# Altium PCB PCB1.PcbDoc
Units mm, origin at the board's own origin, x right, y up, seen from the top; angles counter-clockwise.
Board outline 40.13 x 44.7 mm, 2 copper layers (Top Layer, Bottom Layer); 14 components, 13 nets, 37 pads, 0 vias.
Unrouted connection lines stored in the file: 2.
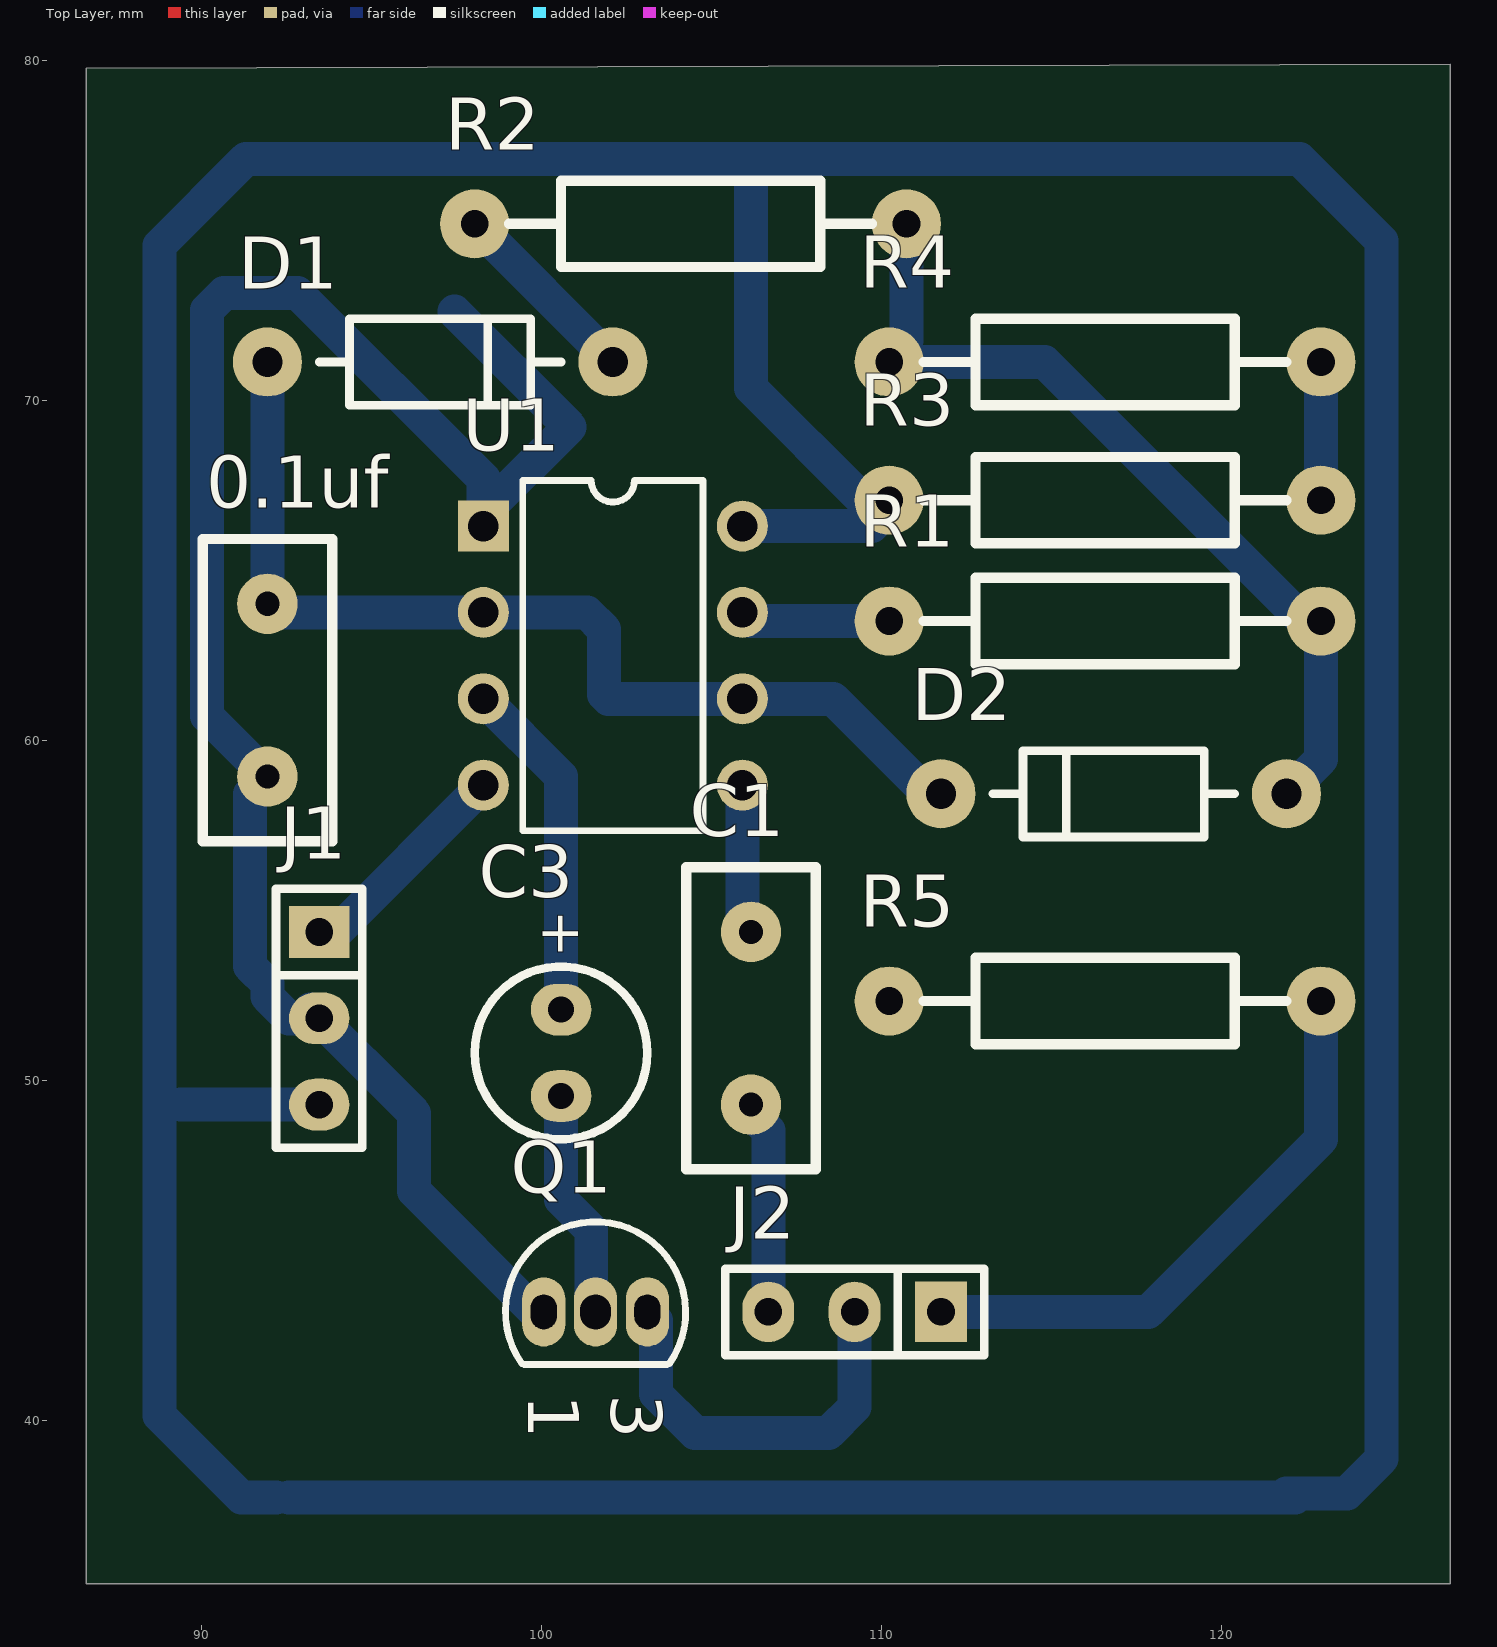
[diagram p0: Top Layer view]
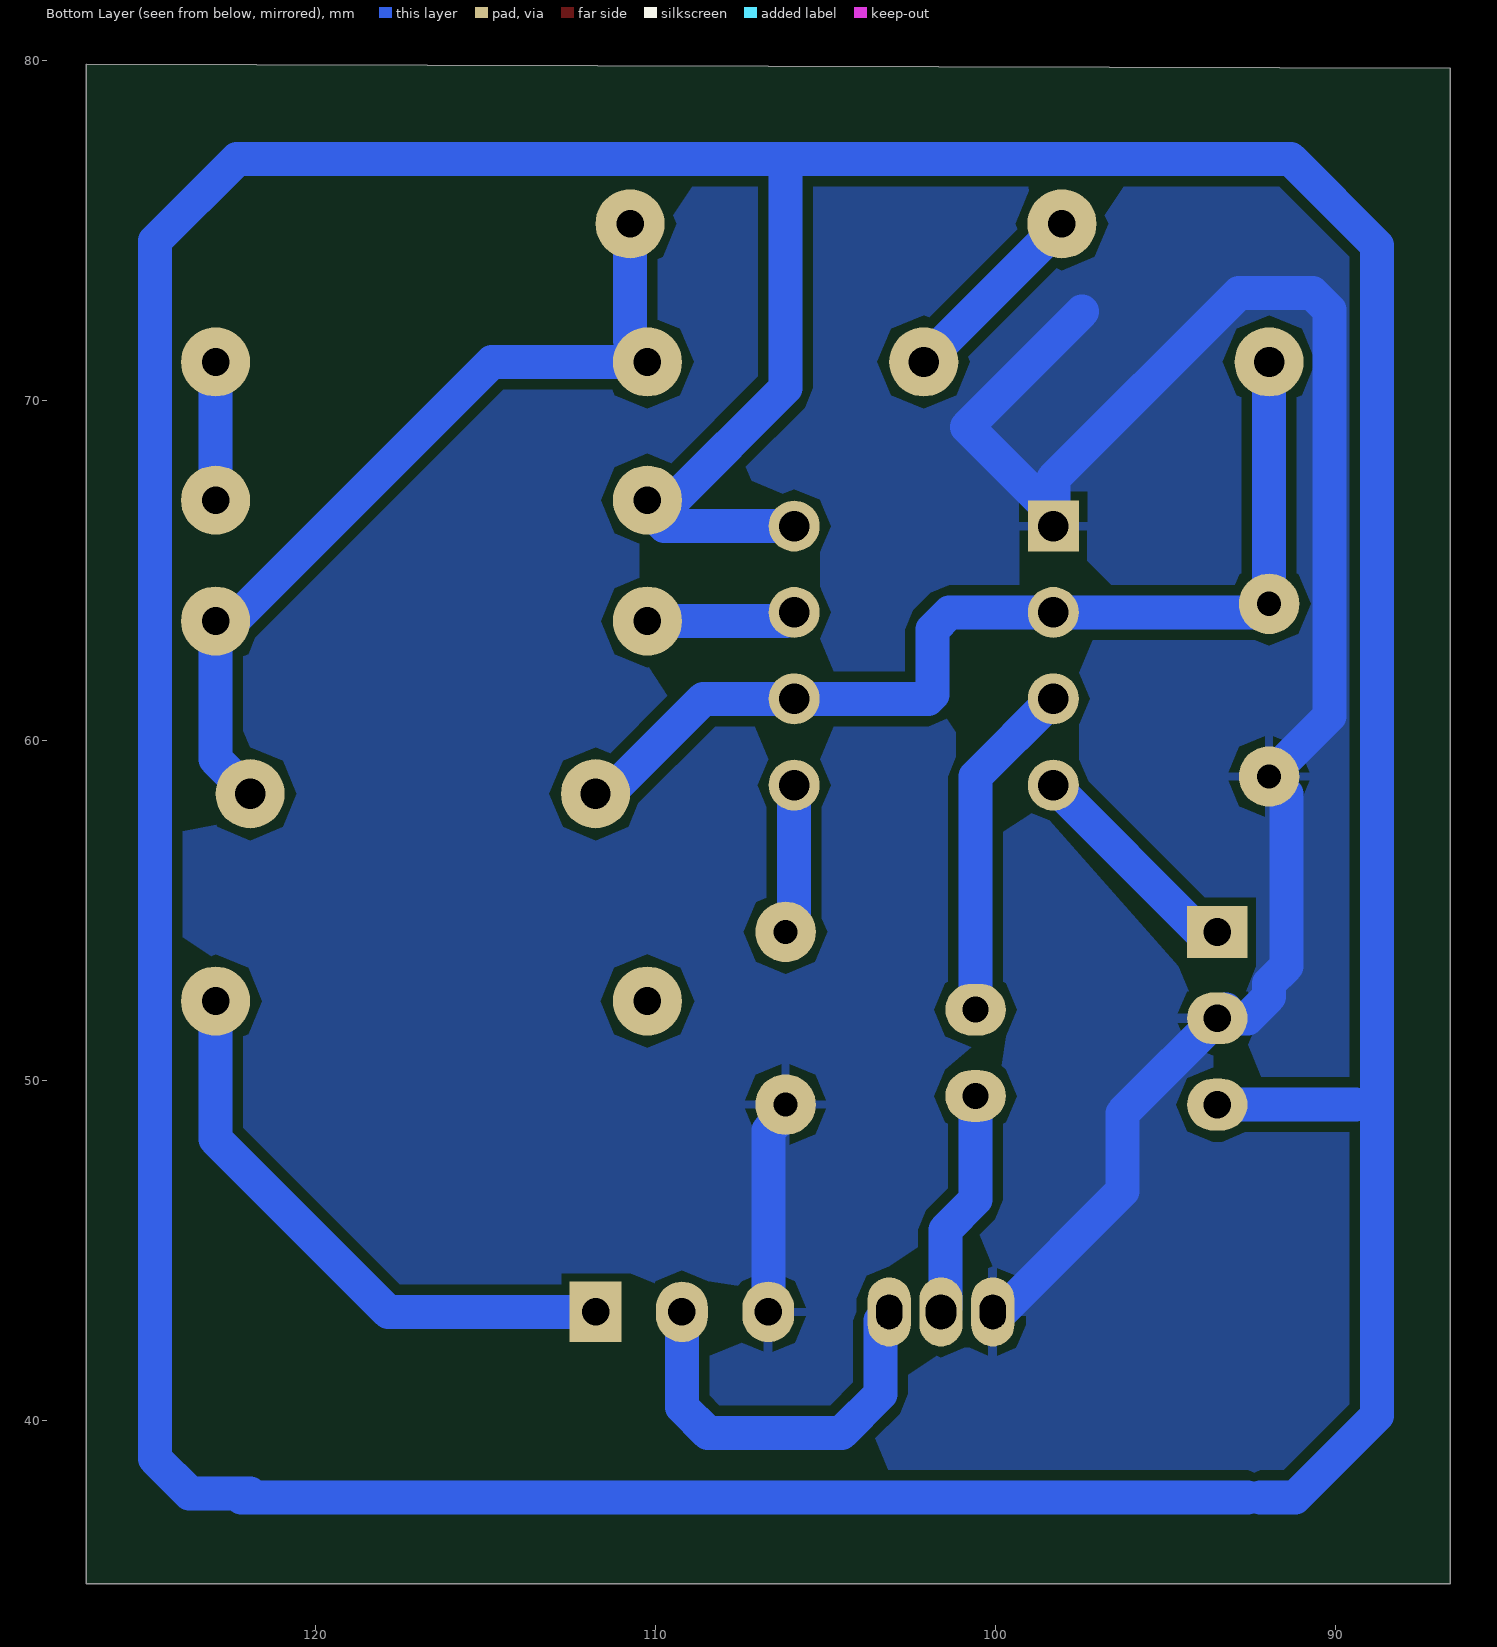
[diagram p1: Bottom Layer view, seen from below]

## Layer stack, top to bottom
Top Layer: signal copper 0.0356
Dielectric: dielectric 0.32, FR-4, Dk 4.8
Bottom Layer: signal copper 0.0356

## Board outline
86.614,79.756 86.614,35.179 126.746,35.179 126.746,79.883

## Design rules (kind name [scope] priority, off if disabled: settings)
Clearance [All] p1: gap=0.254
ComponentClearance [All] p1: gap=0.254 collisioncheckmode=3 verticalgap=0.254
PolygonConnect [All] p1: connectstyle=Relief reliefconductorwidth=0.254 reliefentries=4 polygonreliefangle="90 Angle"
RoutingVias [All] p1: holewidth=0.711 width=1.27 viastyle="Through Hole" minholewidth=0.711 minwidth=1.27 maxholewidth=0.711 maxwidth=1.27
SolderMaskExpansion [All] p1: expansion=0.102
TestPointUsage [All] p1: valid=0 allowmultiple=FALSE
Testpoint [All] p1: side=15 testpointundercomponent=TRUE minsize=1.016 maxsize=2.54 preferedsize=1.524 minholesize=0 maxholesize=1.016 preferedholesize=0.813 testpointgrid=0.025 style=1023 order=0123456789
Width Width_1 [InNet('VCC')] p1: maxlimit=1 minlimit=1 preferedwidth=1
Width [All] p2: maxlimit=1 minlimit=1 preferedwidth=1
18 further rules are at their usual default settings.

## Components (designator, comment, footprint, x,y, rotation, side; value= is the part's Value field where it differs from the comment)
0.1uf "普通电容" RAD0.2 91.948,61.468 r270 top
C1 "0.01uf" RAD0.2 106.172,51.816 r270 top
C3 "EC" RB.1/.2 100.584,50.8 r90 top
D1 "DIODE1" DIODE0.4A 97.028,70.612 r0 top
D2 "DIODE1" DIODE0.4A 116.84,58.928 r180 top
J1 "CON3" SIP3 93.472,51.816 r270 top
J2 "CON3" SIP3 109.22,43.18 r180 top
Q1 "9013" 901# 101.6,43.18 r270 top
R1 "RES" AXIAL0.5 110.236,63.5 r0 top
R2 "RES" AXIAL0.5 98.044,75.184 r0 top
R3 "RES" AXIAL0.5 122.936,67.056 r180 top
R4 "RES" AXIAL0.5 110.236,71.12 r0 top
R5 "RES" AXIAL0.5 110.236,52.324 r0 top
U1 "555" DIP-8 102.108,62.484 r270 top

## Footprints (in the part's own frame and the unit in brackets; to place one, negate y for a bottom-side part, rotate by r counter-clockwise, add the part's x,y. Pads: shape width x height; smd on the part's side, far side on the other; paste and mask are expansions set on the pad)
901# [mil]
  oval 80x50 hole 30 slot 40 at 0 deg: 1(0,-60) 3(0,60)
  oval 80x50 hole 35.43 slot 40 at 0 deg: 2(0,0)
  silkscreen extent -104,-104 61,104
AXIAL0.5 [mil]
  round 80 hole 32: 1(0,0) 2(500,0)
  silkscreen extent 40,-50 460,50
DIODE0.4A [mil]
  round 80 hole 35: A(-200,20) K(200,20)
  silkscreen extent -140,-30 140,70
DIP-8 [mm] "DIP; 8 Leads; Row Spacing 7.62 mm; Pitch 2.54 mm"
  rect 1.5x1.5 hole 0.9: 1(-3.81,-3.81)
  round 1.5 hole 0.9: 2(-1.27,-3.81) 3(1.27,-3.81) 4(3.81,-3.81) 5(3.81,3.81) 6(1.27,3.81) 7(-1.27,3.81) 8(-3.81,3.81)
  silkscreen extent -5.15,-2.65 5.15,2.65
RAD0.2 [mil]
  round 70 hole 28: 1(-100,0) 2(100,0)
  silkscreen extent -175,-75 175,75
RB.1/.2 [mil]
  oval 60x70 hole 30: 1(50,0) 2(-50,0)
  silkscreen extent -100,-100 100,100
SIP3 [mil]
  rect 60x70 hole 32: 1(-100,0)
  oval 60x70 hole 32: 2(0,0) 3(100,0)
  silkscreen extent -150,-50 150,50

## Part data
0.1uf: "Capacitor"
C1: library part 普通电容, "Capacitor"
Q1: library part NPN

## Nets (pads, with @x,y where several pads share a name; then routed paths per layer and width w, separated by ;. In a path a pad name is that pad's centre, name@x,y a point inside that pad or via, vN(x,y) a via of type N, cw(c..) or ccw(c..) an arc to the next point about the centre after c; other vN are vias at no path point)
GND: 0.1uf.2 C1.2 J1.2 J2.3 Q1.1 U1.1 | length 60.7
  Bottom Layer w1: 0.1uf.2@91.44,58.42 91.44,53.348 91.948,52.84 91.948,52.451 92.583,51.816 J1.2 ; 0.1uf.2 90.17,60.706 90.17,72.644 90.678,73.152 92.837,73.152 98.298,67.691 U1.1 ; J1.2@93.218,52.07 96.266,49.022 96.266,46.736 99.822,43.18 Q1.1 ; 97.454,72.599 100.838,69.215 U1.1@98.298,66.675 ; C1.2@106.172,49.022 106.68,48.514 J2.3
Net0.1uf_1: 0.1uf.1 D1.A D2.K U1.2 U1.6 | length 30.4
  Bottom Layer w1: D1.A 0.1uf.1 92.202,63.754 101.346,63.754 101.854,63.246 101.854,61.341 101.981,61.214 108.585,61.214 111.379,58.42 D2.K
NetC1_1: C1.1 U1.5 | length 4.4
  Bottom Layer w1: U1.5 105.918,54.61 C1.1
NetC3_1: C3.1 U1.3 | length 10.1
  Bottom Layer w1: U1.3 100.584,58.928 C3.1
NetC3_2: C3.2 Q1.2 | length 6.8
  Bottom Layer w1: C3.2 100.584,46.482 101.473,45.593 101.473,43.307 Q1.2
NetD1_K: D1.K R2.1 | length 5.7
  Bottom Layer w1: R2.1 D1.K
NetD2_A: D2.A R1.2 R2.2 R4.1 | length 25.9
  Bottom Layer w1: R4.1@109.982,70.993 110.744,71.755 R2.2 ; R4.1 114.808,71.12 122.428,63.5 R1.2 122.936,59.436 D2.A
NetJ1_1: J1.1 U1.4 | length 6.6
  Bottom Layer w1: J1.1 93.98,54.356 U1.4
NetJ2_1: J2.1 R5.2 | length 17.3
  Bottom Layer w1: J2.1 117.856,43.18 122.936,48.26 R5.2
NetJ2_2: J2.2 Q1.3 | length 11.9
  Bottom Layer w1: Q1.3 103.378,42.926 103.378,40.767 104.521,39.624 108.458,39.624 109.22,40.386 J2.2
NetR1_1: R1.1 U1.7 | length 4.6
  Bottom Layer w1: U1.7@105.791,63.881 106.172,63.5 R1.1
NetR3_1: R3.1 R4.2 | length 4.2
  Bottom Layer w1: R3.1@122.809,67.056 R3.1 R4.2
VCC: J1.3 R3.2 R5.1 U1.8 | length 166
  Bottom Layer w1: 89.408,49.276 J1.3@93.091,49.276 ; 92.202,37.719 91.186,37.719 88.773,40.132 88.773,74.549 91.313,77.089 122.301,77.089 124.714,74.676 124.714,38.862 123.698,37.846 121.92,37.846 121.793,37.719 ; 92.583,37.719 122.174,37.719 ; U1.8 109.728,66.294 R3.2@110.236,66.802 ; 106.172,77.089 106.172,70.358 109.474,67.056 R3.2

## Polygon pours and split planes (outlines as drawn)
GND on Bottom Layer "Bottom Layer-No Net" (solid, remove dead copper): 87.757,78.486 87.757,36.703 125.984,36.703 125.73,36.957 125.73,78.486

## Text inside footprints (layer, text, board x,y; h text height)
C3: Top Overlay "+" at 101.092,53.594 h1.22 r90
Q1: Top Overlay "3" at 102.067,40.759 h1.5 r270; Top Overlay "1" at 99.621,40.759 h1.5 r270